# Altium PCB arbinotiU1.PcbDoc
Units mm, origin at the board's own origin, x right, y up, seen from the top; angles counter-clockwise.
Board outline 56.8 x 40.12 mm, 2 copper layers (Top Layer, Bottom Layer); 31 components, 47 nets, 152 pads, 34 vias.
Unrouted connection lines stored in the file: 5.
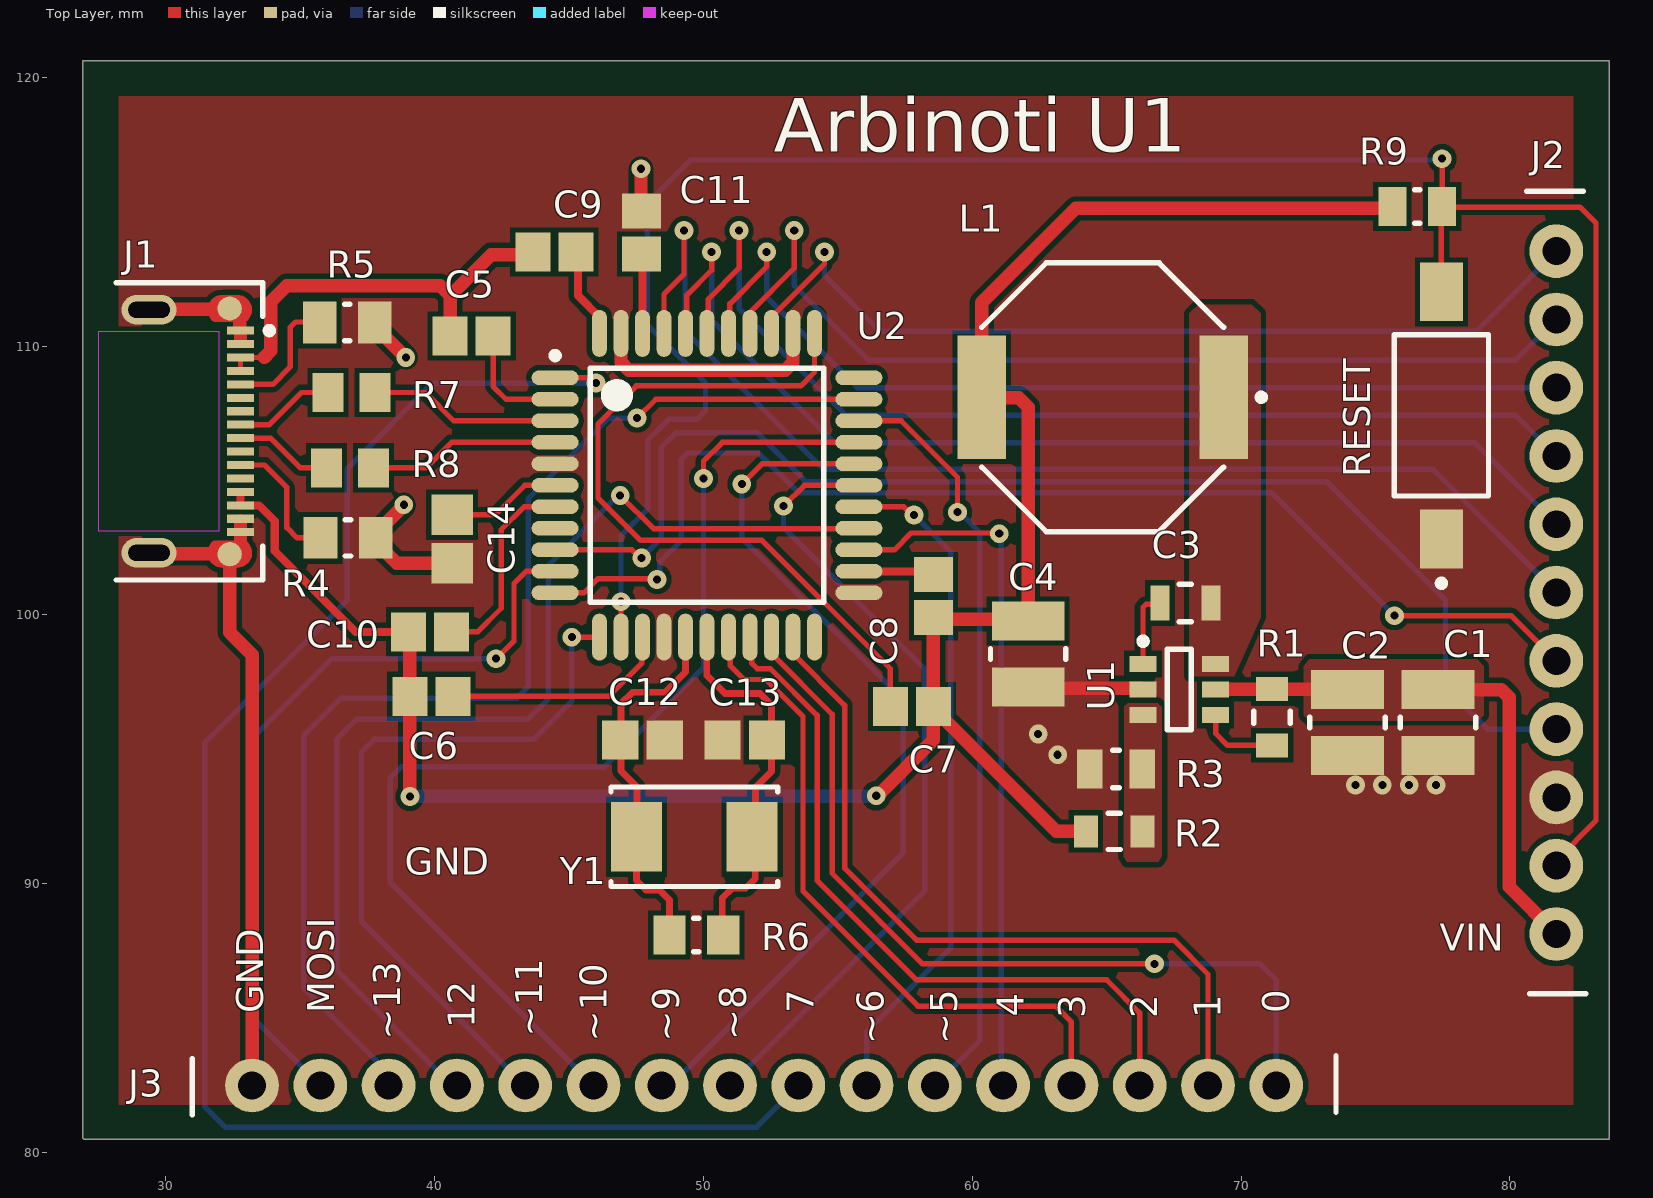
[diagram p0: Top Layer view]
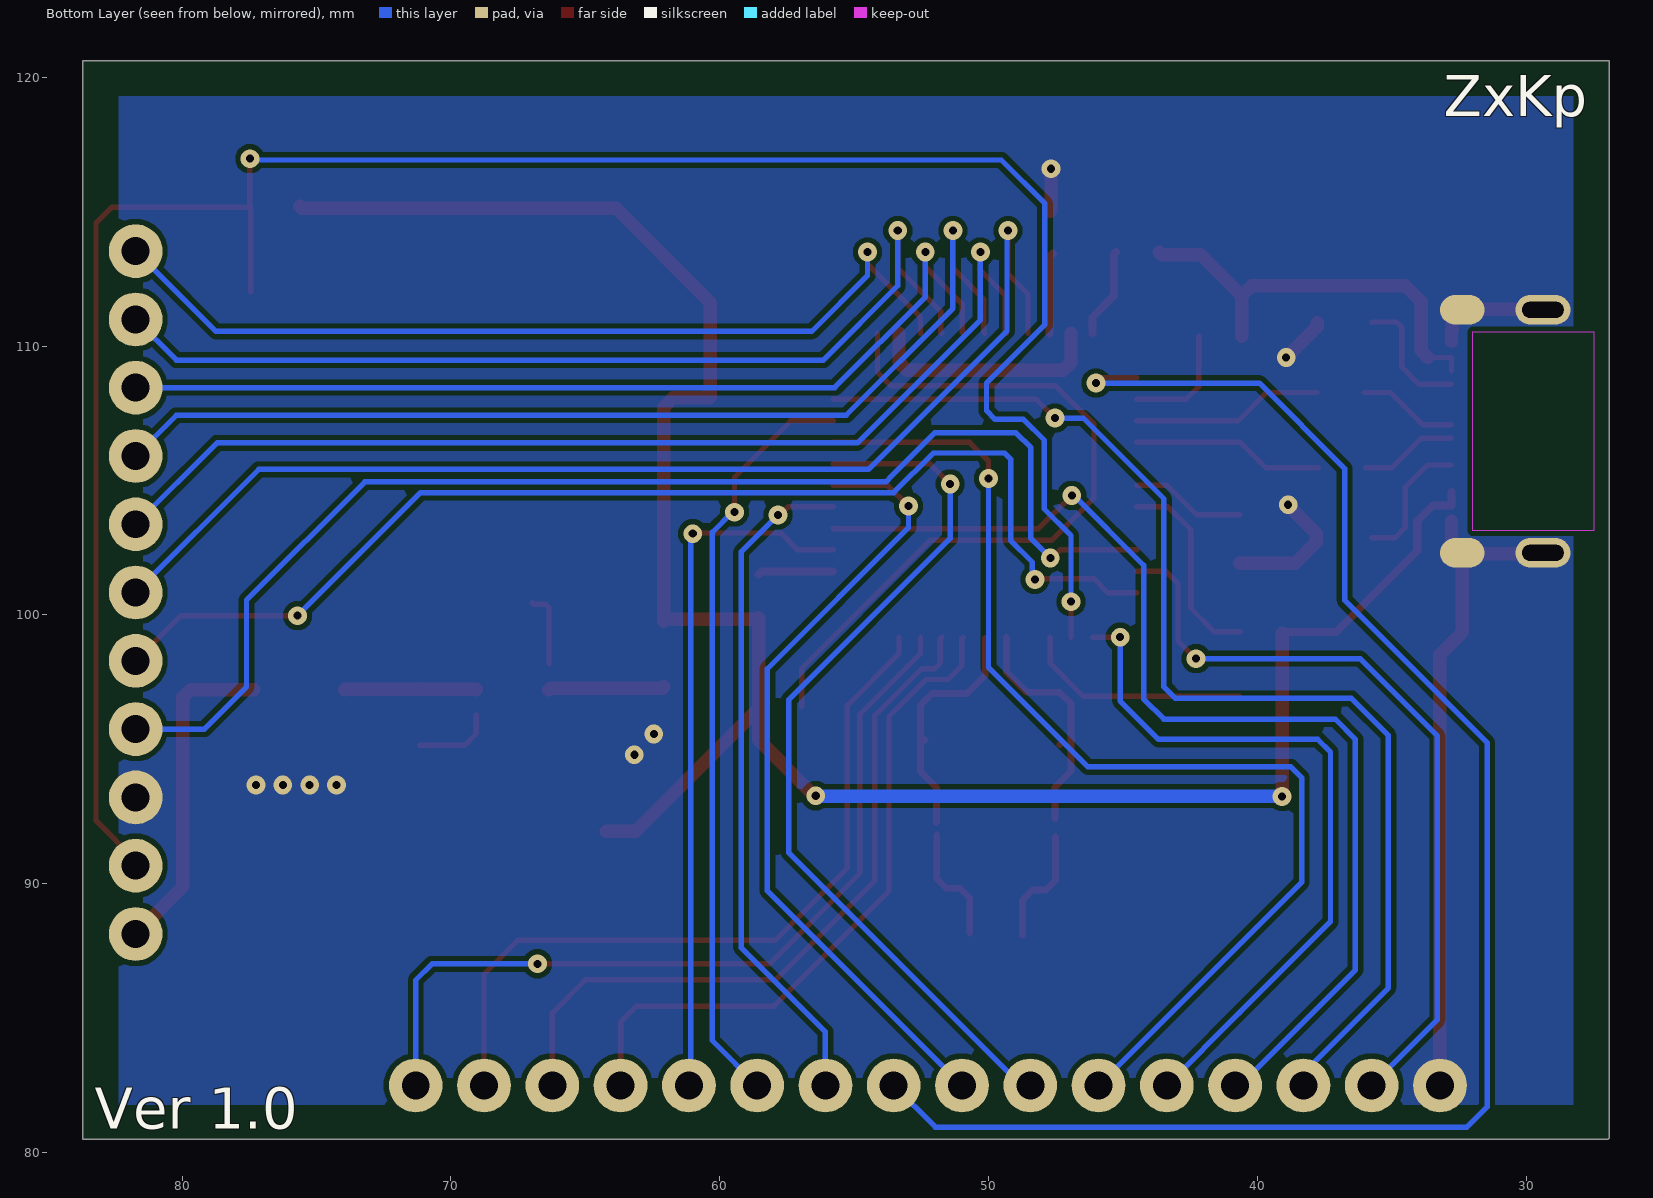
[diagram p1: Bottom Layer view, seen from below]

## Layer stack, top to bottom
Top Solder: solder mask 0.0102, Solder Resist, Dk 3.5
Top Layer: signal copper 0.0356
Dielectric 1: dielectric 0.32, FR-4, Dk 4.8
Bottom Layer: signal copper 0.0356
Bottom Solder: solder mask 0.0102, Solder Resist, Dk 3.5

## Board outline
26.9,80.55 26.9,120.625 83.7,120.625 83.7,80.5 26.95,80.5

## Design rules (kind name [scope] priority, off if disabled: settings)
Clearance [All] p1: gap=0.2 ignorepadtopadclearanceinfootprint=FALSE
PlaneConnect [All] p1: planeconnectstyle=Direct reliefexpansion=0.508 reliefentries=4 reliefconductorwidth=0.254 reliefairgap=0.254
PolygonConnect [All] p1: connectstyle=Direct reliefconductorwidth=0.254 reliefentries=4 polygonreliefangle="90 Angle" airgapwidth=0.254
RoutingVias [All] p1: holewidth=0.3 width=0.7 viastyle="Through Hole" minholewidth=0.3 minwidth=0.7 maxholewidth=0.711 maxwidth=1.27
SolderMaskExpansion [All] p1: expansion=0.102 istentingtop=FALSE
SupplyNets "Schematic Supply Nets_2" [InNet('GND')] p1: voltage=0.000
SupplyNets "Schematic Supply Nets_1" [InNet('VIN')] p2: voltage=0.000
SupplyNets "Schematic Supply Nets" [InNet('+5V')] p3: voltage=0.000
Width [All] p1: maxlimit=1 minlimit=0.2 preferedwidth=0.2
29 further rules are at their usual default settings.

## Components (designator, comment, footprint, x,y, rotation, side; value= is the part's Value field where it differs from the comment)
C1 "0.1uF" FP-CL32-IPC_C 77.325,96 r270 top
C2 "0.1uF" FP-CL32-IPC_C 73.954,96 r270 top
C3 "100nF" FP-GCD21B-0_15-MFG 67.925,100.45 r0 top
C4 "22uF" FP-CL32-IPC_C 62.075,98.55 r270 top
C5 "100nF" CAPC2013X140X50NL20T25 41.375,110.375 r0 top
C6 "100nF" CAPC2013X140X50NL20T25 39.875,96.975 r0 top
C7 "100nF" CAPC2013X140X50NL20T25 57.75,96.6 r180 top
C8 "100nF" CAPC2013X140X50NL20T25 58.55,100.7 r90 top
C9 "100nF" CAPC2013X140X50NL20T25 44.45,113.5 r0 top
C10 "100nF" CAPC2013X140X50NL20T25 39.825,99.375 r0 top
C11 "100nF" CAPC2013X140X50NL20T25 47.7,114.225 r270 top
C12 "22pF" CAPC2013X94X50NL20T25 47.729,95.35 r180 top
C13 "22pF" CAPC2013X94X50NL20T25 51.534,95.35 r0 top
C14 "1uF" CAPC2013X140X50ML20T25 40.65,102.829 r270 top
J1 "213083-0005" FP-2130830005-MFG 29.225,106.83 r270 top
J2 "11_F" header_11 81.725,113.535 r270 top
J3 "16_F" haeder_16 33.205,82.5 r0 top
L1 "744066100" WE-TPC_1038 64.85,108.1 r270 top
R1 "100k" FP-RC0805-0_6-MFG 71.15,96.2 r90 top
R2 "124k" FP-RT0805-MFG 65.275,91.95 r180 top value=124KΩ
R3 "24k" FP-CRCW0805-HPe3-MFG 65.35,94.271 r0 top
R4 "5k" RESC2013X50X30ML20T20 36.775,102.871 r0 top
R5 "5k" RESC2013X50X30ML20T20 36.75,110.879 r0 top
R6 "1M" RESC2013X60X35ML10T20 49.734,88.1 r180 top
R7 "22" RESC2013X70X40NL20T20 36.9,108.275 r0 top
R8 "22" RESC2013X70X40NL20T20 36.85,105.475 r0 top
R9 "1k" RESC2013X60X30NL20T20 76.55,115.2 r180 top
RESET "FSMSM" TECO-FSMSM-2_V 77.45,107.425 r90 top (schematic designator SW1)
U1 "TP6841S6" SOT23127P600-8N 67.7,97.225 r0 top
U2 "ATmega32U4-AU" 44ML_N 50.129,104.825 r0 top
Y1 "16MHz" FP-ABM7-MFG 49.659,91.75 r180 top

## Footprints (in the part's own frame and the unit in brackets; to place one, negate y for a bottom-side part, rotate by r counter-clockwise, add the part's x,y. Pads: shape width x height; smd on the part's side, far side on the other; paste and mask are expansions set on the pad)
44ML_N [mm] "Thin QFP, 44-Leads, Body 10x10mm, Pitch 0.8mm, IPC Medium Density"
  oval 1.75x0.55 smd: 1(-5.65,4) 2(-5.65,3.2) 3(-5.65,2.4) 4(-5.65,1.6) 5(-5.65,0.8) 6(-5.65,0) 7(-5.65,-0.8) 8(-5.65,-1.6) 9(-5.65,-2.4) 10(-5.65,-3.2) 11(-5.65,-4) 23(5.65,-4) 24(5.65,-3.2) 25(5.65,-2.4) 26(5.65,-1.6) 27(5.65,-0.8) 28(5.65,0) 29(5.65,0.8) 30(5.65,1.6) 31(5.65,2.4) 32(5.65,3.2) 33(5.65,4)
  oval 0.55x1.75 smd: 12(-4,-5.65) 13(-3.2,-5.65) 14(-2.4,-5.65) 15(-1.6,-5.65) 16(-0.8,-5.65) 17(0,-5.65) 18(0.8,-5.65) 19(1.6,-5.65) 20(2.4,-5.65) 21(3.2,-5.65) 22(4,-5.65) 34(4,5.65) 35(3.2,5.65) 36(2.4,5.65) 37(1.6,5.65) 38(0.8,5.65) 39(0,5.65) 40(-0.8,5.65) 41(-1.6,5.65) 42(-2.4,5.65) 43(-3.2,5.65) 44(-4,5.65)
  silkscreen extent -5.77,-4.35 4.35,4.95, body extent -5,-5 5,5, height 1.2
CAPC2013X94X50NL20T25 [mm] "Chip Capacitor, 2-Leads, Body 2.01x1.25mm, IPC Medium Density"
  rect 1.35x1.45 smd: 1(-0.825,0) 2(0.825,0)
  body extent -1.1,-0.72 1.11,0.72, height 0.94
CAPC2013X140X50ML20T25 [mm] "Chip Capacitor, 2-Leads, Body 2.00x1.25mm, IPC Low Density"
  rect 1.5x1.55 smd: 1(-0.9,0) 2(0.9,0)
  body extent -1.1,-0.72 1.1,0.72, height 1.4
CAPC2013X140X50NL20T25 [mm] "Chip Capacitor, 2-Leads, Body 2.00x1.25mm, IPC Medium Density"
  rect 1.3x1.45 smd: 1(-0.8,0) 2(0.8,0)
  body extent -1.1,-0.72 1.1,0.72, height 1.4
FP-2130830005-MFG [mm]
  round 0.9 smd paste-1000 mask+0: 1(-4.57,3.15) 2(4.57,3.15)
  rrect100% 1.1x1.65 smd far side paste-1000 mask+0: 1(-4.52,3.15) 2(4.52,3.15)
  rrect100% 1.1x2.05 hole 1.55 slot 0.6 at 0 deg paste-2539.97 mask+0: 3(-4.52,0.15) 4(4.52,0.15)
  rect 0.3x1 smd paste+0 mask+0: A1(-3.75,3.55) A4(-2.75,3.55) A5(-1.75,3.55) A6(-0.75,3.55) A7(0.75,3.55) A8(1.75,3.55) A9(2.75,3.55) A12(3.75,3.55) B1(3.25,3.55) B4(2.25,3.55) B5(1.25,3.55) B6(0.25,3.55) B7(-0.25,3.55) B8(-1.25,3.55) B9(-2.25,3.55) B12(-3.25,3.55)
  Top Layer region: -5.07,3.425 -5.001,3.691 -4.812,3.891 -4.549,3.974 -4.28,3.919 -4.07,3.741 -4.07,3.741 -4.07,2.559 -4.28,2.381 -4.549,2.326 -4.812,2.409 -5.001,2.609 -5.07,2.875 -5.07,2.875
  Top Layer region: 5.07,3.425 5.001,3.691 4.812,3.891 4.549,3.974 4.28,3.919 4.07,3.741 4.07,3.741 4.07,2.559 4.28,2.381 4.549,2.326 4.812,2.409 5.001,2.609 5.07,2.875 5.07,2.875
  Keep-Out Layer region: -3.7,-1.745 3.7,-1.745 3.7,2.755 -3.7,2.755
  silkscreen extent -5.53,-1.07 5.53,4.75, body extent -5.33,-4.18 5.33,4.18, height 0.25
FP-ABM7-MFG [mm]
  rect 1.9x2.6 smd paste+0 mask+0: 1(-2.15,0) 2(2.15,0)
  silkscreen extent -3.1,-1.85 3.1,1.85, body extent -3.2,-1.95 3.2,1.95, height 0.25
FP-CL32-IPC_C [mm]
  rect 1.453x2.704 smd paste+0 mask+0: 1(-1.225,0) 2(1.225,0)
  silkscreen extent -0.2,-1.4 0.2,1.4, body extent -2.05,-1.5 2.05,1.5, height 0.25
FP-CRCW0805-HPe3-MFG [mm]
  rect 0.95x1.45 smd paste+0 mask+0: 1(-0.975,0) 2(0.975,0)
  silkscreen extent -0.13,-0.7 0.13,0.7, body extent -1.55,-0.82 1.55,0.82, height 0.25
FP-GCD21B-0_15-MFG [mm]
  rect 0.7x1.3 smd paste+0 mask+0: 1(-0.95,0) 2(0.95,0)
  silkscreen extent -0.23,-0.7 0.23,0.7, body extent -1.4,-0.8 1.4,0.8, height 0.25
FP-RC0805-0_6-MFG [mm]
  rect 0.9x1.2 smd paste+0 mask+0: 1(-1.05,0) 2(1.05,0)
  silkscreen extent -0.23,-0.67 0.23,0.67, body extent -1.6,-0.77 1.6,0.77, height 0.25
FP-RT0805-MFG [mm]
  rect 0.9x1.2 smd paste+0 mask+0: 1(-1.05,0) 2(1.05,0)
  silkscreen extent -0.23,-0.67 0.23,0.67, body extent -1.6,-0.77 1.6,0.77, height 0.25
haeder_16 [mm]
  round 2 hole 1.04: 24(0,0) 24(0,0) 25(2.54,0) 26(5.08,0) 27(7.62,0) 28(10.16,0) 29(12.7,0) 30(15.24,0) 31(17.78,0) 32(20.32,0) 33(22.86,0) 34(25.4,0) 35(27.94,0) 36(30.48,0) 37(33.02,0) 38(35.56,0) 39(38.1,0)
  silkscreen extent -2.22,-1.1 40.32,1.1
header_11 [mm]
  round 2 hole 1.04: 7(0,0) 8(2.54,0) 9(5.08,0) 10(7.62,0) 11(10.16,0) 12(12.7,0) 13(15.24,0) 14(17.78,0) 15(20.32,0) 16(22.86,0) 17(25.4,0)
  silkscreen extent -2.22,-1.1 27.62,1.1
RESC2013X50X30ML20T20 [mm] "Chip Resistor, 2-Leads, Body 2.00x1.25mm, IPC Low Density"
  rect 1.25x1.55 smd: 1(-1.025,0) 2(1.025,0)
  silkscreen extent -0.1,-0.67 0.1,0.67, body extent -1.1,-0.72 1.1,0.72, height 0.5
RESC2013X60X30NL20T20 [mm] "Chip Resistor, 2-Leads, Body 2.00x1.25mm, IPC Medium Density"
  rect 1.05x1.45 smd: 1(-0.925,0) 2(0.925,0)
  silkscreen extent -0.1,-0.63 0.1,0.63, body extent -1.1,-0.72 1.1,0.72, height 0.6
RESC2013X60X35ML10T20 [mm] "Chip Resistor, 2-Leads, Body 2.00x1.25mm, IPC Low Density"
  rect 1.2x1.45 smd: 1(-1,0) 2(1,0)
  silkscreen extent -0.1,-0.63 0.1,0.63, body extent -1.05,-0.67 1.05,0.67, height 0.6
RESC2013X70X40NL20T20 [mm] "Chip Resistor, 2-Leads, Body 2.00x1.25mm, IPC Medium Density"
  rect 1.15x1.45 smd: 1(-0.875,0) 2(0.875,0)
  body extent -1.1,-0.72 1.1,0.72, height 0.7
SOT23127P600-8N [mm]
  rect 1x0.6 smd: 1(-1.35,0.95) 2(-1.35,0) 3(-1.35,-0.95) 4(1.35,-0.95) 5(1.35,0) 6(1.35,0.95)
  silkscreen extent -1.47,-1.5 0.45,1.92, body extent -1.48,-1.51 1.48,1.51, height 1.1
TECO-FSMSM-2_V [mm] "SMD, 2-Leads, Body 6x3.5mm, Pitch 9.19mm"
  rect 2.2x1.6 smd: 1(-4.595,0)
  rect 2.18x1.6 smd: 2(4.595,0)
  silkscreen extent -6.37,-1.75 3,1.75, body extent -4.98,-1.75 4.98,1.75, height 4.4
WE-TPC_1038 [mm] "Power Inductor, SMD, 2-Leads, body 10x10mm"
  rect 4.6x1.8 smd: 1(0,4.5) 2(0,-4.5)
  silkscreen extent -5,-4.5 5,6.03, body extent -5,-5 5,5, height 3.8

## Part data
C1 C2 C4: library part CMP-13271-003500-1, "Cap Ceramic 22uF 16V X7R ±10% SMD 1210 +125°C Embossed T/R", Case Code (Imperial)=1210, Case Code (Metric)=3225, Dielectric=X7R, Max Operating Temperature=125°C, Min Operating Temperature=-55°C, Package Quantity=1, Tolerance=10%, Voltage=10V, Voltage Rating=16V, Case/Package=1210, Depth=2.5mm, Height=2.5mm, Lead Free="Lead Free", Length=3.2mm, Material=Ceramic, Mount="Surface Mount", Packaging="Tape and Reel", Radiation Hardening=No, Thickness=0.106inch, Voltage Rating (DC)=16V, Width=0.098inch
  C1 C2: Capacitance=0.1uF
  C4: Capacitance=22uF
C3: library part CMP-06035-045527-1, "Chip Multilayer Ceramic Capacitors for Automotive, 0805, 0.10uF, X7R, 15%, 10%, 50V, Grade 1", Case Code (Imperial)=0805, Case Code (Metric)=2012, Dielectric=X7R, Max Operating Temperature=125°C, Min Operating Temperature=-55°C, Package Quantity=3000, Ratings=AEC-Q200, Tolerance=10%, Voltage Rating=50V, Capacitance=100nF, Case/Package=0805, Depth=1.25mm, Height=1.25mm, Length=2mm, Mount="Surface Mount", Packaging="Tape and Reel", Termination=SMD/SMT, Thickness=0.049inch, Voltage Rating (DC)=50V, Weight=0.000335oz, Width=0.049inch
C5 C6 C7 C8 C9 C10 C11: library part CMP-2007-04784-1, Manufacturer="AVX Interconnect / Elco", Part Number=08055F104KAT2A
C12 C13: library part CMP-2007-04137-1, Manufacturer="AVX Interconnect / Elco", Part Number=08051A220KAT2A
C14: library part CMP-1036-04744-2, Manufacturer="AVX Interconnect / Elco", Part Number=0805YC105JAT2A
J1: library part CMP-04767-000030-2, "CONN RCP USB2.0 TYP C 24P SMD RA", Current Rating=5A, Max Operating Temperature=85°C, Min Operating Temperature=-40°C, Voltage Rating=30V, Contact Material="Gold, Nickel", Country of Origin=CN, Gender=Receptacle, NexarPartId=114105384, Number of Contacts=16, Schedule B="8536695050, 8536695050", USB Standard="USB 2.0"
J2: library part header_11
J3: library part header_16
L1: library part CMP-0227-00093-3, Ambient Temperature Range High=95°C, Ambient Temperature Range Low=-40°C, Case/Package=Nonstandard, Current Rating=3.6A, DC Resistance (DCR)=25mΩ, Inductance=10µH, Inductance Tolerance=30%, Max Operating Temperature=125°C, Resistance=28mΩ, Saturation Current=4A, Self Resonant Frequency=20MHz, Series Resistance=35mΩ, Test Frequency=100kHz, Composition=Wirewound, Core Material=Ferrite, Depth=10mm, Height=3.8mm, Height - Seated (Max)=4.0894mm, Length=10mm, Max DC Current=3.6A, Min Operating Temperature=-40°C, Mount="Surface Mount", NexarPartId=22803276, Number of Pins=2, Packaging="Cut Tape (CT)", REACH SVHC=Unknown, RMS Current (Irms)=3.6A, RoHS=Compliant, Shielding=Shielded, Termination=SMD/SMT, Tolerance=30%, Weight=1.273007g, Width=10mm
R1: library part CMP-03412-037835-1, "RES SMD 100K OHM 5% 1/8W 0805", Case Code (Imperial)=0805, Case Code (Metric)=2012, Max Operating Temperature=155°C, Max Power Dissipation=125mW, Min Operating Temperature=-55°C, Resistance=100kR, Resistance Tolerance=5%, Resistor Type="Thick Film", Temperature Coefficient=100ppm/°C, Voltage Rating=150V, Case/Package=0805, Construction=Rectangular, Contact Plating=Tin, Depth=1.25mm, Features="Moisture Resistant", Lead Free="Lead Free", Length=2mm, Military Standard=Not, Number of Terminations=2, Packaging="Tape and Reel", Power Rating=125mW, Radiation Hardening=No, RoHS Compliant=Yes, Series=RC, Size Code=0805, Termination=SMD/SMT, Tolerance=5%
R2: library part CMP-2001-01506-2, "RES 124K OHM 1/8W .1% SMD 0805", Manufacturer=Yageo, Manufacturer Part Number=RT0805BRD07124KL, Package=RT0805, Power Rating=0.125W, Resistance=124KΩ, Temperature="-55°C to +155°C", Temperature Coefficient="25 ppm/°C", Temperature Range High=+155°C, Temperature Range Low=-55°C, Tolerance=0.0025, Voltage Rating=150V, Automotive=No, Category=Res, ComponentLink2Description=Datasheet, ComponentLink2URL=http://www.yageo.com/documents/recent/PYu-RT_1-to-0.01_RoHS_L_9.pdf, Composition="Thin Film", Device Class L1="Passive Components", Device Class L2=Resistors, Device Class L3="Chip SMD Resistors", Digikey Description="RES 124K OHM 1/8W .1% SMD 0805", Footprint Url=http://www.yageo.com/exep/pages/download/literatures/PYu-R_Mount_10.pdf, Height=0.6mm, Ipc Land Pattern Name=RESC200125X50, Lead Free=Yes, Mouser Description="Thin Film Resistors - SMD 1/8W 124K ohm .1% 25ppm", Octopart=https://octopart.com/rt0805brd07124kl-yageo-1365830, RoHS=TRUE, Series=RT
R3: library part CMP-02407-002305-1, "RES Thick Film, 24kΩ, 1%, 0.5W, 100ppm/°C, 0805", Case/Package=0805, Max Operating Temperature=155°C, Max Power Dissipation=333mW, Min Operating Temperature=-55°C, Package Quantity=5000, Power Rating=330mW, Resistance=24kR, Temperature Coefficient=100ppm/°C, Tolerance=1%, Composition="Thick Film", Contact Plating=Tin, Features="Automotive AEC-Q200", Height=0.024inch, Lead Free="Lead Free", Length=0.079inch, Mount="Surface Mount", Number of Terminations=2, Packaging="Tape and Reel", Termination=Wraparound, Width=0.049inch
R4 R5: library part CMP-2001-04234-1, Manufacturer="Vishay Dale", Part Number=CRCW08054K99FKTA
R6: library part CMP-2001-01491-1, Manufacturer=Yageo, Part Number=RT0805BRE071ML
R7 R8: library part CMP-2001-00523-1, Manufacturer=Panasonic, Part Number=ERJ6ENF22R0V
R9: library part CMP-2001-04656-1, Manufacturer="KOA Speer", Part Number=RK73B2ATTD102J
RESET: library part CMP-2000-07511-1, "FSMSM Push Button Switch, 50 mA, -35 to 85 degC, 2-Pin SMD, RoHS, Bulk", Case\/Package=SMD/SMT, Contact Current Rating=50mA, Contact Resistance=100mOhm, Manufacturer="TE Connectivity", Max Operating Temperature=85degC, Max Voltage Rating (DC)=12V, Min Operating Temperature=-35degC, Operating Force=180gf, Package Description="2-Pin Surface Mount Device, Body 6 x 3.5 mm, Pitch 9.19 mm", Package Quantity=1000, Voltage Rating (DC)=24V, Actuator Length=1.07mm, Actuator Material=Polyamide, Contact Material=Brass, Contact Plating=Silver, Current Rating=50mA, Datasheet URL=http://www.te.com/commerce/DocumentDelivery/DDEController?Action=showdoc&DocId=Customer+Drawing%7F1437566-3%7FC2%7Fpdf%7FEnglish%7FENG_CD_1437566-3_C2_1437566_3_1_c.dwg.pdf%7F1437566-3, Datasheet Version="Rev. C2, 08/2014", Electrical Life=20000Cycles, ELV=Compliant, Illumination Type=Illuminated, Lead Free=LeadFree, Manufacturer URL=http://www.te.com/, Mechanical Life=20000Cycles, Mount=SurfaceMount, Mounting Technology=SurfaceMount, Orientation=Straight, Package Reference=FSMSM, Packaging=LoosePiece, REACH SVHC=Unknown, RoHSCompliant=true, Switch Travel=0.25mm, Termination=GullWing, Throw Configuration=SPST
U2: library part CMP-0095-00285-2, "8-bit AVR Microcontroller, 2.7-5.5V, 16MHz, 32KB Flash, 1KB EEPROM, 2.5KB SRAM, USB Controller, 44-pin TQFP, Industrial Grade (-40°C to 85°C), Ext Osc", ComponentLink1Description="Manufacturer URL", ComponentLink1URL=http://www.atmel.com/, ComponentLink2Description="ATmega16U4/32U4 Datasheet", ComponentLink2URL=http://www.atmel.com/dyn/resources/prod_documents/doc7766.pdf, ComponentLink3Description="ATmega16U4 ATmega32U4 Summary", ComponentLink3URL=http://www.atmel.com/dyn/resources/prod_documents/7766S.pdf, DatasheetVersion="revF, Nov-2010", PackageDescription="44-Pin Plastic Thin Quad Flat Pack, 10 x 10 x 1.0 mm Body, 0.8 mm Pitch (TQFP)", PackageReference=44ML, PackageVersion="rev.G, Jul-2007", RevisionNote="DatasheetVersion updated. URLs added."
Y1: library part CMP-27762-000095-1, "Crystal 16MHz ±20ppm 18pF SMD-2 6mm x 3.5mm", Case/Package=CSMD, ESR (Equivalent Series Resistance)=50R, Frequency Stability=30ppm, Frequency Tolerance=20ppm, Load Capacitance=18pF, Max Operating Temperature=85°C, Min Operating Temperature=-40°C, Operating Frequency="16 MHz", Package Quantity=1000, Resistor Type=Ceramic, Depth=3.5mm, Frequency=16MHz, Height=0.055inch, Lead Free="Lead Free", Length=6mm, Mount="Surface Mount", Number of Pins=2, Packaging="Tape and Reel", Radiation Hardening=No, Series=ABM7, Termination=SMD/SMT, Tolerance=20ppm, Width=3.3mm

## Via types
v1: diameter 0.7, hole 0.3, Top Layer to Bottom Layer, 34 vias

## Nets (pads, with @x,y where several pads share a name; then routed paths per layer and width w, separated by ;. In a path a pad name is that pad's centre, name@x,y a point inside that pad or via, vN(x,y) a via of type N, cw(c..) or ccw(c..) an arc to the next point about the centre after c; other vN are vias at no path point)
+5V: C4.1 C5.1 C6.1 C7.1 C8.1 C9.1 C10.1 J1.A4 J1.A9 J1.B4 J1.B9 L1.2 R2.2 R9.2 | length 97.5
  Top Layer w0.2: J1.B9 J1.A4 33.655,109.58
  Top Layer w0.3: J1.B4 J1.A9 33.47,104.08 34.051,103.499 34.051,102.374 37.05,99.375 C10.1 C10.1@39.075,99.325
  Top Layer w0.5: 33.655,109.58 33.9,109.825 33.9,111.65 34.5,112.25 40.2,112.25 40.575,111.875 ; v1(39.075,93.25) C6.1 C10.1@39.075,99.325 ; C5.1 40.575,111.875 ; C9.1 43.55,113.4 42.1,113.4 40.575,111.875 ; v1(56.425,93.275) 56.475,93.275 58.55,95.35 C7.1@58.55,96.525 ; R2.2 63.125,91.95 C7.1@58.55,96.525 ; R9.2 75.55,115.125 63.85,115.125 60.35,111.625 L1.2 60.375,108.075 61.725,108.075 62.075,107.725 C4.1 62.013,99.838 58.612,99.838 C8.1 C7.1 C7.1@58.55,96.525
  Bottom Layer w0.5: v1(39.075,93.25) 39.088,93.263 56.413,93.263 v1(56.425,93.275)
A0: J2.7 U2.36 | length 34
  Top Layer w0.2: U2.36 52.529,111.088 54.5,113.059 v1(54.5,113.5)
  Bottom Layer w0.2: v1(54.5,113.5) 54.5,112.625 56.575,110.55 78.74,110.55 J2.7
A1: J2.8 U2.37 | length 36.7
  Top Layer w0.2: U2.37 51.777,110.523 51.777,111.302 53.375,112.9 v1(53.375,114.3)
  Bottom Layer w0.2: v1(53.375,114.3) 53.375,112.25 56.145,109.48 80.21,109.48 J2.8
A2: J2.9 U2.38 | length 36.1
  Top Layer w0.2: U2.38 50.977,110.523 50.977,111.577 52.35,112.95 v1(52.35,113.5)
  Bottom Layer w0.2: v1(52.35,113.5) 52.35,111.825 55.72,108.455 J2.9
A3: J2.10 U2.39 | length 39.9
  Top Layer w0.2: U2.39 50.177,110.523 50.177,111.752 51.325,112.9 v1(51.325,114.3)
  Bottom Layer w0.2: v1(51.325,114.3) 51.325,111.401 55.296,107.43 80.21,107.43 J2.10
A4: J2.11 U2.40 | length 40.5
  Top Layer w0.2: U2.40 49.377,110.523 49.377,111.902 50.3,112.825 v1(50.3,113.5)
  Bottom Layer w0.2: v1(50.3,113.5) 50.3,110.976 54.871,106.405 78.695,106.405 J2.11
A5: J2.12 U2.41 | length 44.3
  Top Layer w0.2: U2.41 48.529,111.935 49.275,112.681 v1(49.275,114.3)
  Bottom Layer w0.2: v1(49.275,114.3) 49.31,114.265 49.31,110.566 54.461,105.415 77.145,105.415 J2.12
D0: J3.39 U2.20 | length 31.8
  Top Layer w0.2: U2.20 52.529,98.562 54.783,96.308 54.783,90.392 58.15,87.025 v1(66.775,87.025)
  Bottom Layer w0.2: v1(66.775,87.025) 70.7,87.025 71.305,86.42 J3.39
D1: J3.38 U2.21 | length 28.7
  Top Layer w0.2: U2.21 53.329,98.562 55.25,96.641 55.25,90.584 57.927,87.907 67.493,87.907 68.765,86.635 J3.38
D2: J3.37 U2.19 | length 27.3
  Top Layer w0.2: U2.19 51.796,99.108 51.796,98.204 52,98 52.491,98 54.225,96.266 54.225,90.125 57.925,86.425 65,86.425 66.225,85.2 J3.37 J3.37@66.092,82.633
D3: J3.36 U2.18 | length 25.4
  Top Layer w0.2: U2.18 50.996,99.108 50.996,98.104 51.5,97.6 52.325,97.6 53.7,96.225 53.7,89.725 57.975,85.45 63.1,85.45 63.685,84.865 J3.36
D4: J3.35 U2.25 | length 26.1
  Top Layer w0.2: U2.25 57.1,102.425 57.725,103.05 60.975,103.05 v1(61,103.025)
  Bottom Layer w0.2: v1(61,103.025) 61.072,102.953 61.072,82.573 J3.35
D5: J3.34 U2.31 | length 28.2
  Top Layer w0.2: U2.31 57.35,107.225 59.45,105.125 v1(59.45,103.825)
  Bottom Layer w0.2: J3.34 60.275,84.17 60.275,103.075 59.525,103.825 v1(59.45,103.825)
D6: J3.33 U2.27 | length 25.3
  Top Layer w0.2: U2.27 57.458,104.025 57.758,103.725 v1(57.825,103.725)
  Bottom Layer w0.2: J3.33 56.065,84.49 59.2,87.625 59.2,102.35 v1(57.825,103.725)
D7: J3.32 U2.1 | length 61.1
  Top Layer w0.2: U2.1 45.8,108.825 v1(46,108.625)
  Bottom Layer w0.2: v1(46,108.625) 39.925,108.625 36.75,105.45 36.75,100.55 31.45,95.25 31.45,81.7 32.2,80.95 51.975,80.95 J3.32
D+: R8.2 U2.4 | length 7.1
  Top Layer w0.2: R8.2 39.675,105.475 40.625,106.425 U2.4
D-: R7.2 U2.3 | length 7.1
  Top Layer w0.2: R7.2 39.65,108.275 40.7,107.225 U2.3
GND: C1.2 C2.2 C4.2 C11.1 C12.1 C13.1 C14.2 J1.1 J1.2 J1.3 J1.4 J1.A1 J1.A12 J1.B1 J1.B12 J2.15 J3.24 R3.1 R4.2 R5.2 RESET.1 U1.2 U2.5 U2.15 U2.23 U2.35 U2.43 | length 50.5
  Top Layer w0.5: J1.4 29.4,102.285 32.35,102.285 J1.2@32.375,102.26 ; J1.3 29.4,111.375 32.35,111.375 32.375,111.4 32.45,111.4 32.75,111.1 32.75,110.605 J1.A1 J1.B12@32.775,110.18 ; J1.B1@32.775,103.48 J1.A12 32.775,102.553 32.482,102.26 J1.2@32.375,102.26 ; J3.24@33.205,82.5 33.205,98.52 32.375,99.35 J1.2@32.375,102.26 ; R5.2 37.775,110.729 v1(38.925,109.579) v1@38.925,109.575 ; v1(38.85,104.1) 38.85,104.071 37.8,103.021 R4.2 37.8,102.721 38.591,101.929 C14.2 ; U2.43 46.929,109.393 47.222,109.1 53.036,109.1 53.329,109.393 U2.35 ; v1(47.675,116.6) 47.675,115.05 C11.1 ; C4.2 62.125,97.275 66.3,97.275 U1.2
  other v1: 74.25,93.675 75.25,93.675 76.25,93.675 77.25,93.675 63.175,94.8 62.45,95.575
IO8: J3.31 U2.28 | length 29.8
  Top Layer w0.2: v1(52.975,104.05) 53.75,104.825 U2.28
  Bottom Layer w0.2: J3.31 58.225,89.74 58.225,98 52.975,103.25 v1(52.975,104.05)
IO9: J3.30 U2.29 | length 33.4
  Top Layer w0.2: v1(51.425,104.875) 52.175,105.625 U2.29
  Bottom Layer w0.2: J3.30 48.775,82.5 57.425,91.15 57.425,96.85 51.425,102.85 v1(51.425,104.875)
IO10: J3.29 U2.30 | length 41.7
  Top Layer w0.2: v1(50,105.075) 50,105.725 50.7,106.425 U2.30
  Bottom Layer w0.2: J3.29 38.35,90.055 38.35,93.95 38.75,94.35 46.3,94.35 50,98.05 v1(50,105.075)
IO11: J3.28 U2.12 | length 26.9
  Top Layer w0.2: v1(45.1,99.175) U2.12
  Bottom Layer w0.2: J3.28 40.655,85.21 37.275,88.59 37.275,94.9 37.75,95.375 43.675,95.375 45.1,96.8 v1(45.1,99.175)
IO12: J3.27 U2.26 | length 41.5
  Top Layer w0.2: v1(46.9,104.45) 48.138,103.212 55.767,103.212 U2.26
  Bottom Layer w0.2: J3.27 40.65,82.5 36.35,86.8 36.35,95.375 37.1,96.125 43.475,96.125 44.225,96.875 44.225,101.85 46.825,104.45 v1(46.9,104.45)
IO13: J3.26 U2.32 | length 44.3
  Top Layer w0.2: v1(47.525,107.325) 48.225,108.025 U2.32
  Bottom Layer w0.2: J3.26 38.285,82.968 35.125,86.128 35.125,95.525 36.5,96.9 43.05,96.9 43.475,97.325 43.475,104.325 46.475,107.325 v1(47.525,107.325)
MISO: J2.13 U2.11 | length 44.7
  Top Layer w0.2: U2.11 45.55,100.825 46.075,101.35 48.25,101.35 v1(48.275,101.325) ; v1(75.7,99.975) 80.045,99.975 J2.13
  Bottom Layer w0.2: v1(48.275,101.325) 48.371,101.421 48.371,101.971 49.175,102.775 49.175,105.8 49.4,106.025 52.05,106.025 53.525,104.55 71.125,104.55 v1(75.7,99.975)
MOSI: J3.25 U2.10 | length 29
  Top Layer w0.2: v1(42.275,98.375) 42.3,98.375 42.95,99.025 42.95,101.175 43.4,101.625 U2.10
  Bottom Layer w0.2: J3.25 33.3,84.945 33.3,95.5 36.175,98.375 v1(42.275,98.375)
NetC3_1: C3.1 U1.1 | length 2.8
  Top Layer w0.2: U1.1 66.35,100.283 66.467,100.4 66.925,100.4 C3.1
NetC3_2: C3.2 L1.1 U1.6
NetC5_2: C5.2 U2.2 | length 4.4
  Top Layer w0.2: C5.2 42.175,108.5 42.65,108.025 U2.2
NetC6_2: C6.2 U2.14 | length 8.5
  Top Layer w0.2: C6.2 46.475,96.975 47.696,98.196 47.696,99.141 U2.14
NetC7_2: C7.2 U2.34 | length 28
  Top Layer w0.2: U2.34 54.129,109.029 53.625,108.525 47.5,108.525 46.075,107.1 46.075,104.356 47.656,102.775 52.175,102.775 56.95,98 C7.2
NetC8_2: C8.2 U2.24 | length 2.8
  Top Layer w0.3: U2.24 58.425,101.625 C8.2
NetC9_2: C9.2 U2.44 | length 3.4
  Top Layer w0.3: C9.2 45.325,113.425 45.325,111.879 46.129,111.075 U2.44
NetC10_2: C10.2 U2.7 | length 7.5
  Top Layer w0.2: C10.2 41.6,99.375 42.475,100.25 42.475,103.175 43.325,104.025 U2.7
NetC11_2: C11.2 U2.42 | length 3
  Top Layer w0.3: C11.2@47.6,113.45 47.729,113.321 U2.42
NetJ1_A5: J1.A5 R5.1 | length 4.8
  Top Layer w0.2: J1.A5 33.98,108.58 34.625,109.225 34.625,110.7 34.825,110.9 35.704,110.9 R5.1
NetJ1_A6: J1.A6 J1.B6 R8.1 | length 3.7
  Top Layer w0.2: J1.B6 33.895,106.58 35,105.475 R8.1
NetJ1_A7: J1.A7 J1.B7 R7.1 | length 3.7
  Top Layer w0.2: J1.B7 33.855,107.08 35.05,108.275 R7.1
NetJ1_B5: J1.B5 R4.1 | length 5
  Top Layer w0.2: J1.B5 33.67,105.58 34.501,104.749 34.501,103.249 34.879,102.871 R4.1
NetR1_1: R1.1 U1.4 | length 3
  Top Layer w0.2: U1.4 69.05,95.6 69.5,95.15 R1.1
NetR2_1: R2.1 R3.2 U1.3
RES: J2.16 R9.1 RESET.2 U2.13 | length 84.6
  Top Layer w0.2: v1@46.925,100.5 v1(46.929,100.496) U2.13 ; RESET.2 R9.1@77.45,115.175 ; R9.1@77.475,115.175 82.6,115.175 83.2,114.575 83.2,92.35 81.725,90.875 J2.16 ; R9.1 v1(77.475,116.975)
  Bottom Layer w0.2: v1(46.929,100.496) 46.929,102.954 47.925,103.95 47.925,106.503 48.697,107.275 49.75,107.275 50.075,107.6 50.075,108.625 47.9,110.8 47.9,115.3 49.525,116.925 77.425,116.925 v1(77.475,116.975)
SCK: J2.14 U2.9 | length 47.7
  Top Layer w0.2: U2.9 47.333,102.425 47.633,102.125 v1(47.7,102.125)
  Bottom Layer w0.2: v1(47.7,102.125) 48.425,102.85 48.425,106.225 48.975,106.775 52,106.775 53.7,105.075 53.7,105.067 53.817,104.95 73.2,104.95 77.6,100.55 77.6,97.325 79.17,95.755 J2.14
ucap: C14.1 U2.6 | length 4.3
  Top Layer w0.2: C14.1 42.254,103.729 43.35,104.825 U2.6
VIN: C1.1 C2.1 J2.17 R1.2 U1.5 | length 17.2
  Top Layer w0.5: U1.5 69.063,97.237 71.138,97.237 R1.2 71.162,97.238 73.942,97.238 C2.1 ; C1.1 79.682,97.225 79.975,96.932 79.975,89.885 J2.17
XTAL1: C13.2 R6.1 U2.17 Y1.1 | length 13.6
  Top Layer w0.254: U2.17@50.121,99.125 50.121,97.754 50.8,97.075 52.1,97.075 52.525,96.65 C13.2@52.525,95.321 ; R6.1@50.696,88.162 50.696,89.462 51.071,89.837 51.571,89.837 51.921,90.188 Y1.1@51.921,91.812 ; Y1.1@51.934,92.279 51.934,93.575 52.534,94.175 C13.2@52.534,95.35 ; C13.2 C13.2@52.534,95.525
XTAL2: C12.2 R6.2 U2.16 Y1.2 | length 13.2
  Top Layer w0.254: C12.2 C12.2@46.925,95.371 ; C12.2@47.346,95.175 C12.2@47.35,95.171 ; Y1.2 47.509,90.125 47.859,89.775 48.359,89.775 48.734,89.4 R6.2 ; Y1.2@47.525,92.425 47.525,93.6 46.925,94.2 C12.2@46.925,95.371 ; U2.16 49.329,97.879 48.575,97.125 47.35,97.125 46.925,96.7 C12.2@46.925,95.371
pads on no net: J1.A8 J1.B8 U2.8 U2.22 U2.33

## Polygon pours and split planes (outlines as drawn)
GND on Top Layer "GND_L01_P012" (solid, pour order 12): 28.254,81.85 28.254,119.3 82.354,119.3 82.354,81.85
GND on Top Layer "GND_L01_P011" (solid, pour order 11): 28.246,81.775 28.246,119.225 82.346,119.225 82.346,81.775
GND on Top Layer "GND_L01_P010" (solid, pour order 10): 28.25,81.85 28.25,119.3 82.35,119.3 82.35,81.85
VIN on Top Layer "VIN_L01_P007" (solid, pour order 7): 72.325,98.088 72.525,98.35 78.775,98.35 79.025,98.1 79.025,96.275 78.825,96.075 72.525,96.075 72.325,96.275
GND on Top Layer "GND_L01_P005" (solid, pour order 5): 72.375,95.575 72.575,95.775 78.9,95.775 79.125,95.55 79.125,93.1 78.925,92.9 72.625,92.9 72.375,93.15
GND on Top Layer "GND_L01_P004" (solid, pour order 4): 65.081,93.55 64.85,93.35 63.75,93.35 63.55,93.55 60.65,96.45 60.65,98.075 60.894,98.319 60.9,98.325 65.081,98.325
NetC3_2 on Top Layer "NETC3_2_L01_P003" (solid, pour order 3): 69.75,97.725 68.075,97.725 68.075,111.225 68.4,111.55 70.4,111.55 70.725,111.225 70.725,99.925
NetR2_1 on Top Layer "NETR2_1_L01_P002" (solid, pour order 2): 65.65,94.025 65.65,96.6 65.8,96.75 66.875,96.75 67.05,96.575 67.05,91.026 66.925,90.825 65.75,90.825 65.7,90.9 65.631,91.004
GND on Bottom Layer "GND_L02_P015" (solid, pour order 15): 28.25,81.775 28.25,119.3 82.35,119.3 82.35,81.775

## Silkscreen, mask and mechanical layers (free items; w line width, h text height)
Top Overlay:
  text "Arbinoti U1" at 52.604,117.229 h2
  text "GND" at 38.879,90.329 h1
  text "VIN" at 77.379,87.504 h1
  text "GND" at 33.621,85.179 h1 r90
  text "MOSI" at 36.271,85.179 h1 r90
  text "7" at 54.096,85.179 h1 r90
  text "0" at 71.796,85.179 h1 r90
  text "4" at 61.921,85.054 h1 r90
  text "3" at 64.196,85.004 h1 r90
  text "2" at 66.871,85.004 h1 r90
  text "1" at 69.246,85.004 h1 r90
  text "12" at 41.496,84.629 h1 r90
  text "~11" at 43.996,84.304 h1 r90
  text "~13" at 38.721,84.204 h1 r90
  text "~8" at 51.596,84.179 h1 r90
  text "~10" at 46.396,84.129 h1 r90
  text "~9" at 49.096,84.129 h1 r90
  text "~6" at 56.696,84.029 h1 r90
  text "~5" at 59.446,84.029 h1 r90
Bottom Overlay:
  text "ZxKp" at 33.071,118.562 h1.52
  text "Ver 1.0" at 83.246,80.879 h1.52
Mechanical 1:
  lines w0.2: 26.9,80.55 26.9,81.95 26.9,120.625 83.7,120.625 83.7,80.5 27.987,80.5 27.262,80.5 26.95,80.5 26.9,80.55